# EAGLE board HackmodWear_workingcopy (EAGLE 9.2.0)
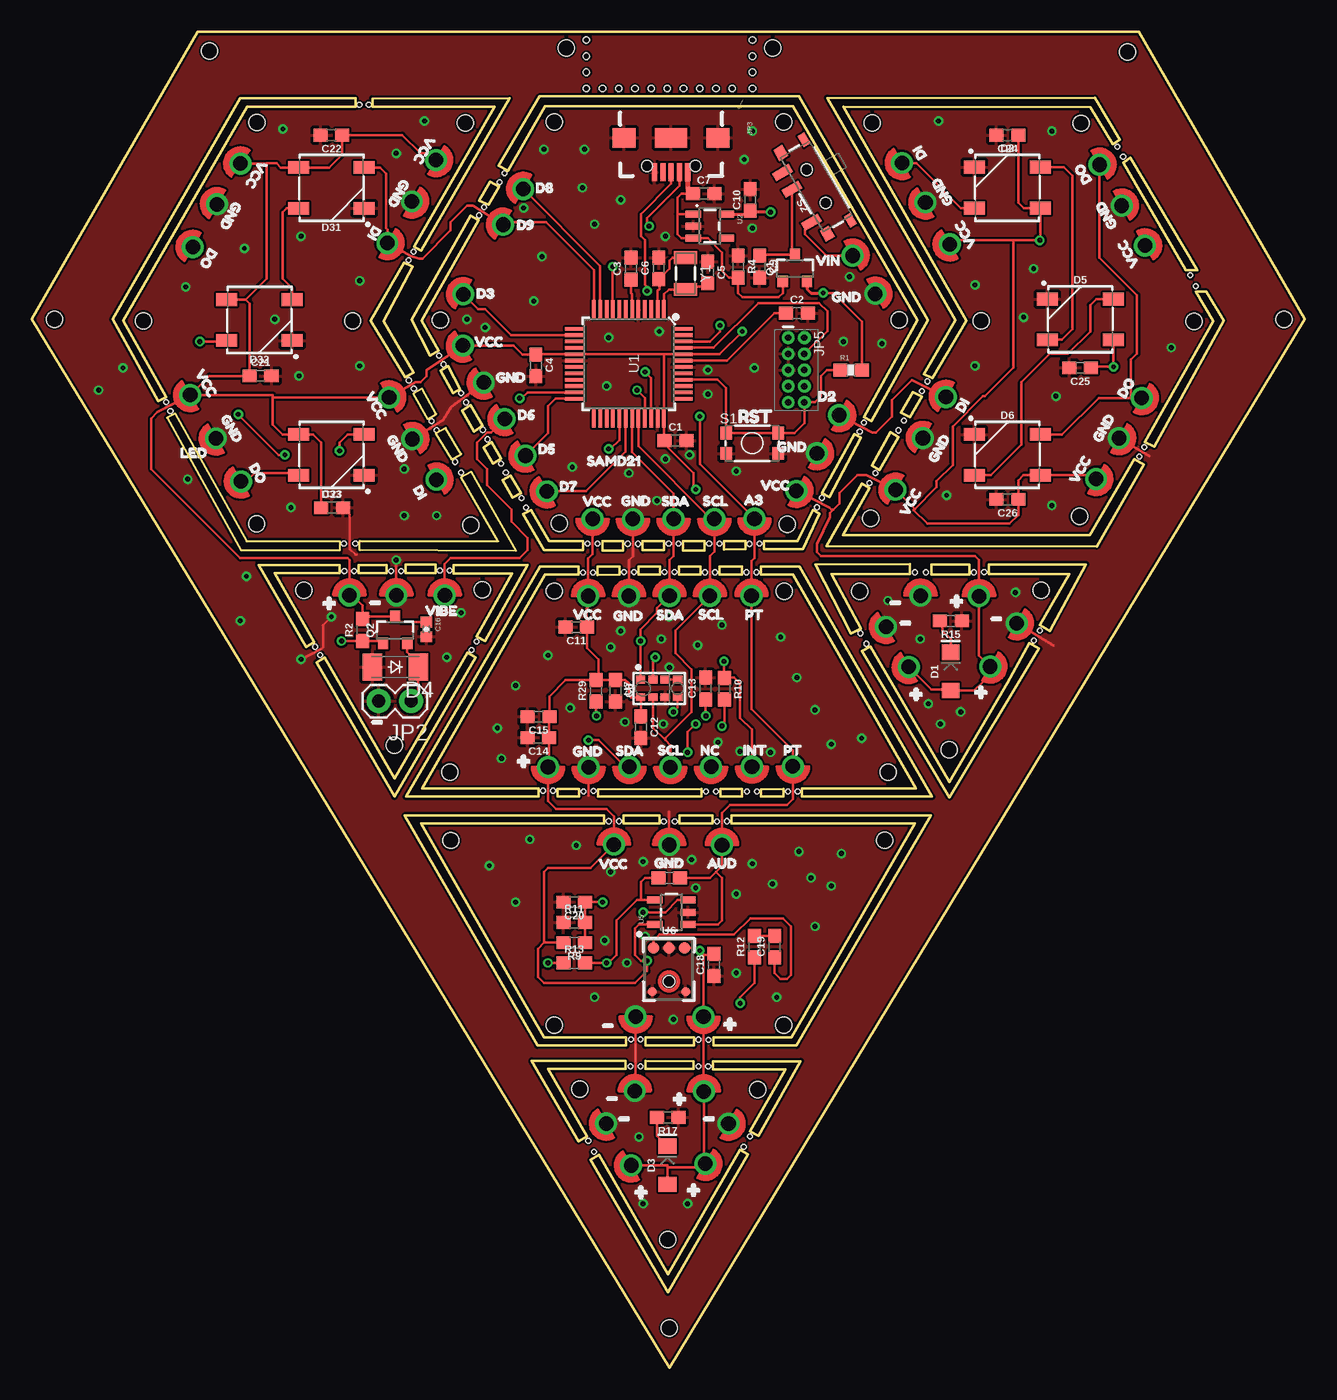
[diagram p0: board, top side]
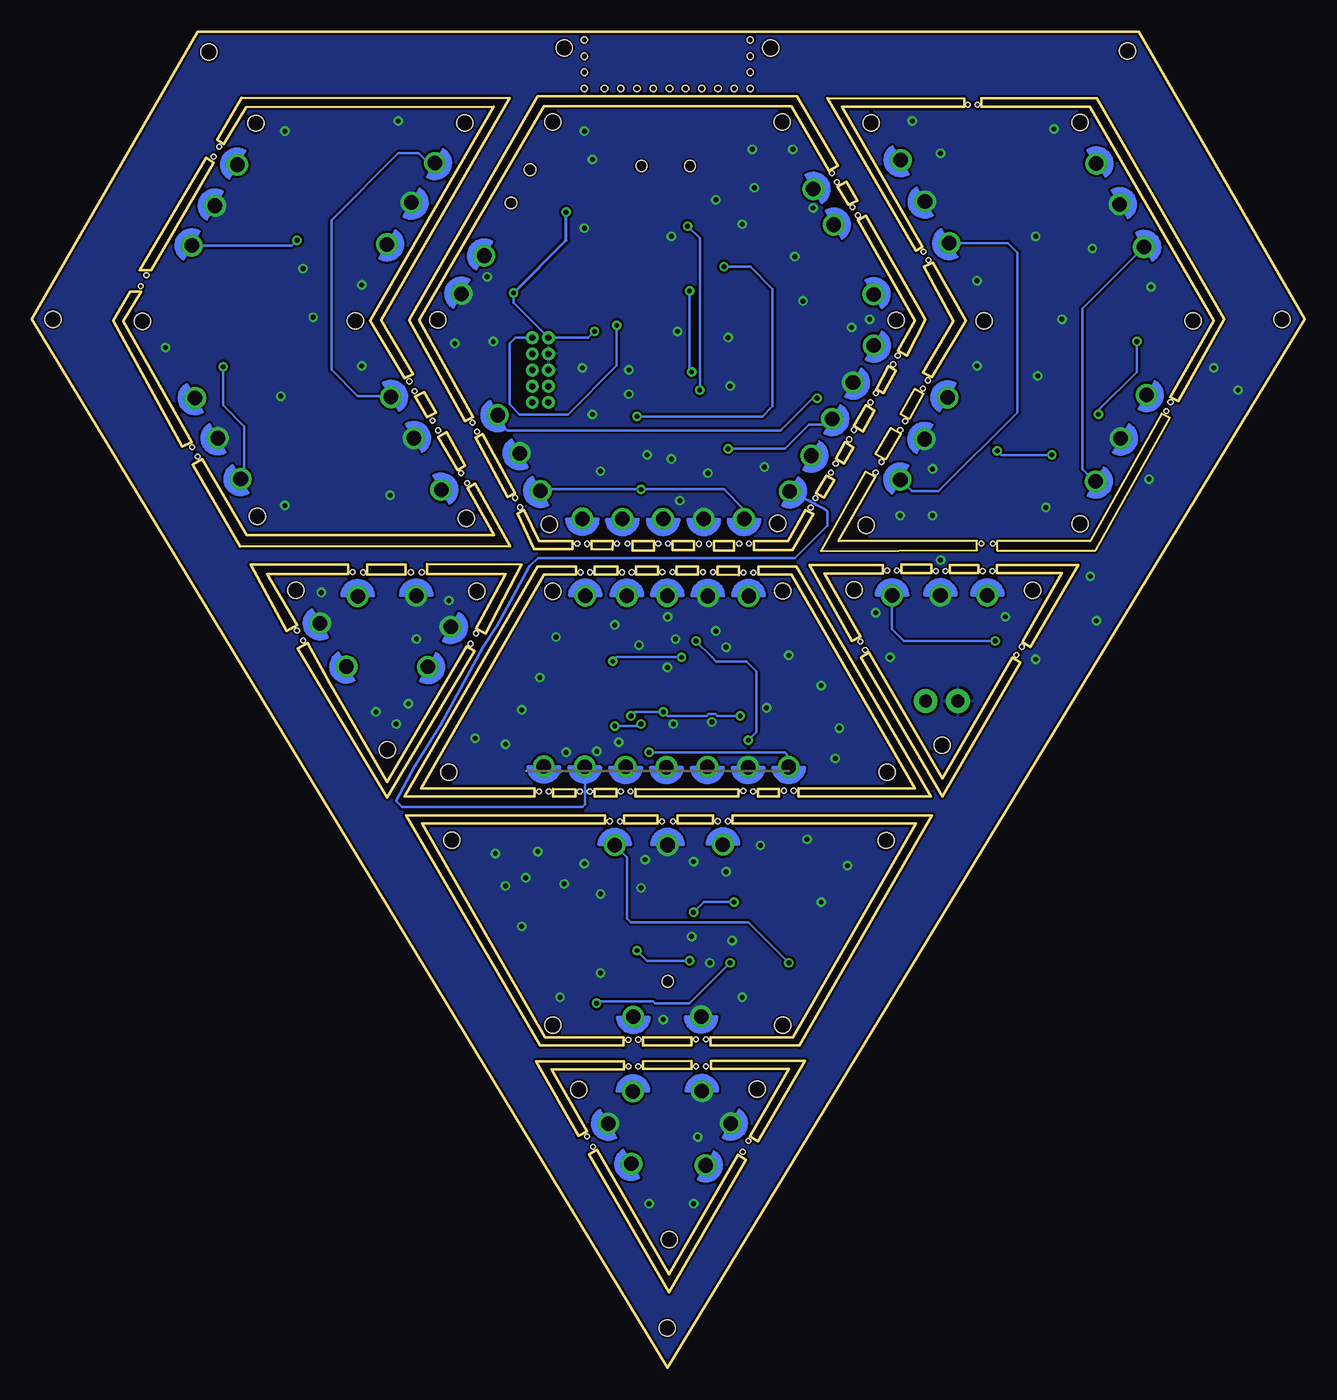
[diagram p1: board, bottom side, seen from below]

Size 99.85 x 104.77 mm. Coordinates in mm from the lower left corner, seen from the top.
Outline: 13.02,104.78 86.84,104.78 99.85,82.23 50.01,0 0,82.23 13.02,104.78
Outline: 19.05,62.33 24.14,62.33 24.14,62.96 17.78,62.96 21.51,56.53 22.15,56.92 19.05,62.33
Outline: 25.62,62.31 27.84,62.31 27.84,62.96 25.62,62.96 25.62,62.31
Outline: 29.31,62.31 31.65,62.31 31.65,62.97 29.31,62.97 29.31,62.31
Outline: 33.1,62.3 37.67,62.3 34.87,57.36 35.55,56.99 38.88,62.94 33.1,62.94 33.1,62.3
Outline: 34.18,56.09 28.45,46.2 22.96,55.68 22.33,55.3 28.45,44.8 34.81,55.71 34.18,56.09
Outline: 30.61,45.43 39.73,45.45 39.73,44.81 29.34,44.8 39.88,62.83 42.88,62.83 42.88,62.2 40.26,62.2 30.61,45.43
Outline: 41.24,45.4 42.9,45.4 42.9,44.8 41.24,44.8 41.24,45.4
Outline: 69.34,45.43 59.69,62.2 57.18,62.2 57.18,62.83 60.2,62.83 70.61,44.8 60.41,44.81 60.41,45.45 69.34,45.43
Outline: 44.37,62.19 46.09,62.2 46.09,62.82 44.37,62.82 44.37,62.19
Outline: 47.59,62.2 49.28,62.2 49.28,62.83 47.59,62.83 47.59,62.2
Outline: 50.75,62.21 52.45,62.21 52.45,62.85 50.75,62.85 50.75,62.21
Outline: 53.92,62.2 55.72,62.2 55.72,62.83 53.92,62.83 53.92,62.2
Outline: 44.42,45.36 44.42,44.81 52.51,44.81 52.51,45.37 44.42,45.36
Outline: 62.71,62.23 68.86,62.24 68.86,63.02 61.45,62.99 64.26,57.6 65.02,57.96 62.71,62.23
Outline: 70.55,62.21 73.55,62.21 73.55,63 70.55,63 70.55,62.21
Outline: 75.06,62.25 81.39,62.25 79.06,58.24 79.87,57.79 82.68,63.01 75.06,63.01 75.06,62.25
Outline: 65.77,56.57 71.97,45.94 76.5,53.7 78.23,56.83 78.99,56.39 71.98,44.74 65.13,56.23 65.77,56.57
Outline: 7.16,82.12 10.54,76.12 9.92,75.8 6.33,82.23 16.33,99.56 25.39,99.56 25.39,98.91 16.88,98.91 7.16,82.12
Outline: 16.84,64.83 24.15,64.83 24.15,64.1 16.42,64.09 10.6,74.52 11.23,74.84 16.84,64.83
Outline: 25.72,64.85 36.58,64.83 33.68,69.87 34.46,70.28 37.96,64.07 25.72,64.12 25.72,64.85
Outline: 31.69,73.27 32.91,71.23 33.68,71.66 32.46,73.7 31.69,73.27
Outline: 29.91,76.4 31.04,74.42 31.72,74.81 30.59,76.79 29.91,76.4
Outline: 29.26,77.68 29.96,78.05 27.57,82.07 29.87,86.34 29.18,86.66 26.58,82.12 29.26,77.68
Outline: 29.98,87.94 36.3,98.9 26.72,98.9 26.72,99.55 37.45,99.56 30.51,87.62 30.17,87.83 29.98,87.94
Outline: 30.57,82.14 35.05,89.99 34.43,90.35 29.77,82.19 31.23,79.37 31.9,79.79 30.57,82.14
Outline: 35.1,91.54 35.81,91.21 36.65,92.63 35.95,93.02 35.1,91.54
Outline: 32.65,78.54 33.6,76.77 33.06,76.44 32.07,78.2 32.65,78.54
Outline: 34.42,75.51 35.36,73.9 34.68,73.43 33.76,75.05 34.42,75.51
Outline: 44.77,64.83 46.37,64.83 46.37,64.09 44.77,64.09 44.77,64.83
Outline: 47.9,64.83 49.59,64.83 49.59,64.13 47.9,64.13 47.9,64.83
Outline: 51.07,64.82 52.76,64.83 52.76,64.09 51.07,64.08 51.07,64.82
Outline: 54.29,64.82 55.97,64.83 55.97,64.19 54.29,64.18 54.29,64.82
Outline: 37.35,93.87 36.61,94.29 39.84,99.72 43.45,99.72 60.19,99.73 70.27,82.18 65.86,74.26 65.26,74.55 69.47,82.16 59.69,98.94 40.27,98.94 37.35,93.87
Outline: 73.3,82.12 70.62,77.6 69.95,77.93 72.45,82.16 62.4,99.58 83.38,99.59 85.34,96.32 84.8,95.97 83.03,98.88 63.64,98.89 73.3,82.12
Outline: 69.81,76.16 68.86,74.57 68.15,74.9 69.11,76.51 69.81,76.16
Outline: 67.98,73.01 66.47,70.39 65.88,70.76 67.33,73.37 67.98,73.01
Outline: 65.68,68.99 63.6,65.32 82.99,65.32 86.49,71.27 87.24,70.85 83.53,64.42 62.33,64.45 65.1,69.36 65.68,68.99
Outline: 36.07,72.6 36.79,71.3 36.16,70.91 35.42,72.18 36.07,72.6
Outline: 37.54,69.98 38.35,68.59 37.72,68.24 36.91,69.63 37.54,69.98
Outline: 39.17,67.25 40.56,64.83 43.23,64.83 43.23,64.13 40.18,64.13 38.53,66.94 39.17,67.25
Outline: 85.61,94.53 90.51,86.1 91.41,86.1 86.18,94.9 85.61,94.53
Outline: 91.29,84.4 92.68,82.09 87.3,72.59 88.05,72.25 93.49,82.12 92.13,84.4 91.29,84.4
Outline: 69.25,42.67 54.88,42.67 54.88,43.31 70.52,43.31 59.98,25.27 53.46,25.27 53.46,25.91 59.59,25.91 69.25,42.67
Outline: 53.4,42.67 50.78,42.67 50.78,43.31 53.4,43.31 53.4,42.67
Outline: 30.51,42.67 40.16,25.91 46.62,25.91 46.62,25.27 39.66,25.27 29.24,43.31 44.89,43.32 44.89,42.68 30.51,42.67
Outline: 51.93,25.91 48.13,25.91 48.13,25.27 51.93,25.27 51.93,25.91
Outline: 49.23,42.67 49.23,43.31 46.42,43.31 46.42,42.67 49.23,42.67
Outline: 40.48,23.43 46.57,23.42 46.57,24.05 39.21,24.07 42.89,17.77 43.53,18.15 40.48,23.43
Outline: 48.13,23.44 51.9,23.43 51.9,24.04 48.13,24.06 48.13,23.44
Outline: 53.42,23.41 59.1,23.41 56.32,18.54 56.99,18.17 60.31,24.04 53.42,24.04 53.42,23.41
Outline: 55.53,17.09 49.88,7.3 44.47,16.68 43.83,16.29 49.88,5.91 56.17,16.71 55.53,17.09
Outline: 57.44,64.84 57.44,64.19 60.47,64.19 61.77,66.99 61.25,67.25 60.06,64.84 57.44,64.84
Outline: 61.96,68.6 64.52,73.21 65.04,72.94 62.55,68.3 61.96,68.6
Outline: 54.01,45.37 54.01,44.81 55.72,44.81 55.72,45.37 54.01,45.37
Outline: 57.2,45.36 57.2,44.81 58.96,44.81 58.96,45.37 57.2,45.36
Copper layers (1*16): Top 0.035mm / dielectric 1.5mm / Bottom 0.035mm
Design rules "SparkFun-2-layer-TIGHT": minimum track width 7mil, minimum drill 15mil, track to track 7mil, track to pad 7mil, pad to pad 7mil, via to via 7mil, smd to smd 7mil, copper to edge 7mil, drill to drill 7mil, minimum pad ring 7mil, minimum via ring 7mil, stop-mask expansion 4mil, vias tented up to drill 25mil, thermal gap 10mil
Holes 1.27 mm at 32.78,46.72 34.43,66.09 79.16,60.97 34.02,97.62 40.97,26.87 66.91,41.35 59.27,66.13 21.34,60.96 28.45,48.82 41.91,103.5 58.99,26.86 35.35,61 85.96,103.18 65.91,97.63 65.79,66.61 82.3,97.61 40.97,60.91 59,60.88 41.37,66.21 32.06,82.16 40.99,97.73 50,3.11 8.76,82.12 17.63,97.66 17.63,66.2 71.96,48.48 74.47,82.11 64.95,60.88 67.16,46.69 82.17,66.76 58.1,103.5 25.16,82.09 13.92,103.27 42.98,21.83 56.94,21.82 32.86,41.35 58.99,97.72 68.03,82.18 91.18,82.08 49.87,10.04 1.79,82.22 98.2,82.24
Holes 0.51 mm at 43.5,100.33 43.5,101.6 43.5,102.87 43.5,104.14 56.52,100.33 56.52,101.6 56.52,102.87 56.52,104.14 48.58,100.33 47.31,100.33 46.04,100.33 44.77,100.33 53.66,100.33 52.39,100.33 51.12,100.33 49.85,100.33 54.93,100.33
Holes 0.38 mm at 25.69,99.05 26.43,99.07 29.54,86.87 29.93,87.55 29.57,77.44 29.96,76.78 31.35,74.24 31.74,73.54 33.21,71.05 33.67,70.21 31.94,79.38 32.29,78.69 33.66,76.45 34.07,75.71 35.74,72.82 35.37,73.56 36.8,70.9 37.17,70.21 38.4,68.19 38.76,67.46 43.59,64.63 44.37,64.64 46.74,64.62 47.54,64.62 49.96,64.63 50.72,64.63 53.13,64.63 53.94,64.64 56.29,64.62 57.07,64.64 56.06,62.38 56.83,62.39 53.57,62.39 52.79,62.39 50.41,62.4 49.61,62.4 47.22,62.4 46.44,62.4 44.02,62.38 43.24,62.37 24.52,62.49 25.37,64.63 24.47,64.64 25.28,62.48 28.19,62.48 28.96,62.5 32,62.51 32.77,62.51 34.87,56.97 34.49,56.29 22.21,56.55 22.63,55.89 40.09,45.26 40.87,45.26 43.27,45.21 44.06,45.22 52.88,45.19 53.66,45.19 56.1,45.21 56.87,45.21 45.25,42.86 46.05,42.86 49.57,42.85 50.43,42.84 52.28,23.62 53.05,23.64 46.97,23.62 47.75,23.63 65,57.6 65.46,56.78 79.07,57.82 78.59,57.04 73.88,62.39 74.7,62.41 70.13,62.39 69.27,62.39 87.27,72.21 86.86,71.47 91.31,84.82 90.87,85.68 85.6,94.99 85.15,95.76 70.24,77.36 65.27,74.13 69.82,76.61 68.41,74.29 67.98,73.51 66.18,70.17 65.71,69.37 35.06,90.37 35.48,91.02 10.53,75.74 10.86,75.04 36.69,92.98 37.09,93.69 64.93,73.42 61.57,67.48 61.96,68.23 60.07,45.2 59.31,45.2 53.73,42.84 54.52,42.86 43.65,17.79 44.09,16.92 55.84,17.32 56.32,18.14 46.99,25.74 47.75,25.74 52.29,25.73 53.08,25.72

## Footprints (pad centres in the part's own frame; a part is rotated, then mirrored left to right if it is on the bottom)
0603 = smd 1.1 x 1: 1 -0.85,0; 2 0.85,0
0402-CAP = smd 0.85 x 0.9: 1 -0.58,0; 2 0.58,0
LED-1206 = smd 1.2 x 1.4: A -1.5,0; C 1.5,0
WS2812B = smd 1.651 x 1: 1 2.577,-1.6; 2 2.577,1.6; 3 -2.577,1.6; 4 -2.577,-1.6
SOD-123_MINI-SMA = smd 1.5 x 2.1: A 1.8,0; C -1.8,0
1X01 = drill 1.143: P$1 0,0
1X02@1 = drill 1.016 pad 1.88: 1 0,0; 2 2.54,0
USB-AB-MICRO-SMD_V03 = smd 1.4 x 0.4: D+1 2.7,0; D-1 2.7,0.65; GND1 2.7,-1.3; ID1 2.7,-0.65; VBUS1 2.7,1.3 | smd 1.5 x 1.8: SHIELD1 0,3.68; SHIELD3 0,-3.68 | smd 1.5 x 2.5: SHIELD2 0,0 | hole 0.85: 2.2,1.9; 2.2,-1.9
2X5-PTH-1.27MM = drill 0.508 pad 1: 1 -2.54,-0.635; 2 -2.54,0.635; 3 -1.27,-0.635; 4 -1.27,0.635; 5 0,-0.635; 6 0,0.635; 7 1.27,-0.635; 8 1.27,0.635; 9 2.54,-0.635; 10 2.54,0.635
SOT23-3 = smd 0.8 x 0.9: 1 -0.95,-1; 2 0.95,-1; 3 0,1.1
0603-RES@1 = smd 1.1 x 1: 1 -0.85,0; 2 0.85,0
TACTILE_SWITCH_SMD_4.6X2.8MM = smd 0.9 x 1: 1 -2.05,-0.8; 2 2.05,-0.8; 3 2.05,0.8; 4 -2.05,0.8
SWITCH_SPST_SMD_A = smd 0.7 x 1.5: 1 -2.25,-1.75; 2 -0.75,-1.75; 3 2.25,-1.75 | smd 1 x 0.6: GND1 -3.65,1; GND3 3.65,1 | smd 1 x 0.8: GND2 -3.65,-1.1; GND4 3.65,-1.1 | hole 0.9: -1.5,0; 1.5,0
TQFP-48 = smd 1.5 x 0.28: 1 -4.25,2.75; 2 -4.25,2.25; 3 -4.25,1.75; 4 -4.25,1.25; 5 -4.25,0.75; 6 -4.25,0.25; 7 -4.25,-0.25; 8 -4.25,-0.75; 9 -4.25,-1.25; 10 -4.25,-1.75; 11 -4.25,-2.25; 12 -4.25,-2.75; 25 4.25,-2.75; 26 4.25,-2.25; 27 4.25,-1.75; 28 4.25,-1.25; 29 4.25,-0.75; 30 4.25,-0.25; 31 4.25,0.25; 32 4.25,0.75; 33 4.25,1.25; 34 4.25,1.75; 35 4.25,2.25; 36 4.25,2.75 | smd 0.28 x 1.5: 13 -2.75,-4.25; 14 -2.25,-4.25; 15 -1.75,-4.25; 16 -1.25,-4.25; 17 -0.75,-4.25; 18 -0.25,-4.25; 19 0.25,-4.25; 20 0.75,-4.25; 21 1.25,-4.25; 22 1.75,-4.25; 23 2.25,-4.25; 24 2.75,-4.25; 37 2.75,4.25; 38 2.25,4.25; 39 1.75,4.25; 40 1.25,4.25; 41 0.75,4.25; 42 0.25,4.25; 43 -0.25,4.25; 44 -0.75,4.25; 45 -1.25,4.25; 46 -1.75,4.25; 47 -2.25,4.25; 48 -2.75,4.25
SOT23-5 = smd 0.55 x 1.2: 1 -0.95,-1.3; 2 0,-1.3; 3 0.95,-1.3; 4 0.95,1.3; 5 -0.95,1.3
ADMP401 = smd 0.9 x 0.9: 1 -1.2,2.62; 5 1.2,2.62; 6 0,2.62 | smd 0.7 x 0.7: 2 1.3,-0.8; 4 -1.3,-0.8 | hole 0.9: 0,0
APDS-9960 = smd 0.6 x 0.72: 1 0.7,1.455; 2 0.7,0.485; 3 0.7,-0.485; 4 0.7,-1.455; 5 -0.7,-1.455; 6 -0.7,-0.485; 7 -0.7,0.485; 8 -0.7,1.455
CRYSTAL-SMD-3.2X1.5MM = smd 1 x 1.8: P$1 -1.25,0; P$2 1.25,0

## Placement (x,y rotation side)
C1  0.1uF  [0603]  50.48,72.71 0 top
C2  0.1uF  [0603]  60.01,82.71 0 top
C3  0.1uF  [0603]  46.99,86.2 90 top
C4  0.1uF  [0603]  39.53,78.61 270 top
C5  15pF  [0603]  53.02,85.92 270 top
C6  15pF  [0603]  49.17,86.23 90 top
C7  0.1uF  [0603]  52.71,92.08 0 top
C8  1.0uF  [0603]  45.78,53.1 270 top
C9  10uF  [0603]  57.09,86.36 270 top
C10  10uF  [0603]  56.36,91.6 90 top
C11  1.0uF  [0603]  42.7,58.08 180 top
C12  1.0uF  [0603]  47.76,50.24 270 top
C13  1.0uF  [0603]  52.85,53.27 90 top
C14  1.0uF  [0603]  39.71,49.42 180 top
C15  1.0uF  [0603]  39.74,51.06 180 top
C16  1.0uF  [0402-CAP]  30.95,57.91 270 top
C17  100pF  [0603]  50.01,38.42 0 top
C18  0.1uF  [0603]  53.5,31.59 90 top
C19  4.7uF  [0603]  58.26,33.02 90 top
C20  1.0uF  [0603]  42.55,36.51 180 top
C21  0.1uF  [0603]  17.94,77.79 0 top
C22  0.1uF  [0603]  23.49,96.68 180 top
C23  0.1uF  [0603]  23.55,67.45 0 top
C24  0.1uF  [0603]  76.52,96.68 180 top
C25  0.1uF  [0603]  82.23,78.42 180 top
C26  0.1uF  [0603]  76.52,68.1 180 top
D1  [LED-1206]  72.07,54.61 90 top
D2  WS2812B  [WS2812B]  76.52,92.55 0 top
D3  [LED-1206]  49.85,15.88 90 top
D4  MBR120ESF  [SOD-123_MINI-SMA]  28.51,54.95 180 top
D5  WS2812B  [WS2812B]  82.24,82.22 0 top
D6  WS2812B  [WS2812B]  76.52,71.6 0 top
D31  WS2812B  [WS2812B]  23.5,92.53 180 top
D32  WS2812B  [WS2812B]  17.85,82.17 180 top
D33  WS2812B  [WS2812B]  23.49,71.6 180 top
J1  [1X01]  52.68,27.52 180 top
J2  [1X01]  47.36,27.55 180 top
J3  [1X01]  38.72,71.54 120 top
J4  [1X01]  28.59,60.58 0 top
J5  [1X01]  40.4,68.74 120 top
J6  [1X01]  35.45,77.27 120 top
J7  [1X01]  67.75,68.86 60 top
J8  [1X01]  38.55,92.45 60 top
J9  [1X01]  36.96,89.65 60 top
J10  [1X01]  56.68,66.59 180 top
J11  [1X01]  47.15,66.57 180 top
J12  [1X01]  50.34,66.58 180 top
J13  [1X01]  50.08,47.11 180 top
J14  [1X01]  63.32,74.71 243 top
J15  [1X01]  53.18,60.53 0 top
J16  [1X01]  50.01,60.53 0 top
J17  [1X01]  43.64,60.52 0 top
J18  [1X01]  37.08,74.42 120 top
J19  [1X01]  46.83,60.52 0 top
J20  [1X01]  24.91,60.57 0 top
J21  [1X01]  32.39,60.57 0 top
J22  [1X01]  56.45,60.54 0 top
J23  [1X01]  33.84,84.19 60 top
J24  [1X01]  53.28,47.12 180 top
J25  [1X01]  31.7,94.72 240 top
J26  [1X01]  31.72,69.65 300 top
J27  [1X01]  14.53,91.26 60 top
J28  [1X01]  40.49,47.12 180 top
J29  [1X01]  43.67,47.11 180 top
J30  [1X01]  45.65,41.03 0 top
J31  [1X01]  49.99,41 0 top
J32  [1X01]  27.89,88.21 240 top
J33  [1X01]  29.83,72.83 300 top
J34  [1X01]  28.02,76.1 300 top
J35  [1X01]  59.69,47.16 180 top
J37  [1X01]  54.13,40.99 0 top
J38  [1X01]  53.54,66.57 180 top
J39  [1X01]  46.87,47.12 180 top
J40  [1X01]  56.48,47.15 180 top
J41  [1X01]  16.41,69.51 120 top
J42  [1X01]  71.7,76.14 60 top
J43  [1X01]  29.81,91.47 240 top
J44  [1X01]  16.36,94.44 55 top
J45  [1X01]  12.42,76.3 120 top
J46  [1X01]  14.44,72.89 120 top
J47  [1X01]  72,88.11 120 top
J48  [1X01]  83.74,94.35 300 top
J49  [1X01]  85.49,91.14 300 top
J50  [1X01]  87.05,76.06 240 top
J51  [1X01]  70.09,91.4 120 top
J52  [1X01]  87.31,88.02 300 top
J53  [1X01]  68.25,94.49 120 top
J54  [1X01]  12.62,87.9 60 top
J55  [1X01]  69.89,72.91 60 top
J56  [1X01]  33.82,80.17 120 top
J57  [1X01]  83.48,69.71 240 top
J58  [1X01]  85.27,72.91 240 top
J59  [1X01]  77.25,58.39 240 top
J60  [1X01]  75.17,55 240 top
J61  [1X01]  67,58.11 120 top
J62  [1X01]  68.79,54.96 120 top
J63  [1X01]  69.7,60.55 0 top
J64  [1X01]  74.3,60.51 0 top
J65  [1X01]  47.29,21.69 0 top
J66  [1X01]  52.83,15.99 240 top
J67  [1X01]  45.04,19.15 120 top
J68  [1X01]  47,15.87 120 top
J69  [1X01]  54.64,19.14 240 top
J70  [1X01]  52.71,21.67 0 top
J71  [1X01]  64.37,87.22 300 top
J72  [1X01]  66.15,84.23 300 top
J73  [1X01]  43.99,66.58 180 top
J75  [1X01]  61.58,71.73 240 top
J76  [1X01]  59.96,68.78 240 top
JP2  [1X02@1]  29.74,52.28 180 top
JP3  [USB-AB-MICRO-SMD_V03]  50.15,96.46 270 top
JP5  CORTEX_DEBUGPTH  [2X5-PTH-1.27MM]  59.96,78.25 270 top
Q1  ZXMP6A13F  [SOT23-3]  59.85,86.2 0 top
Q2  NTR4101P  [SOT23-3]  28.49,57.83 0 top
R1  10K  [0603-RES@1]  64.26,78.24 0 top
R2  10k  [0603]  25.94,57.85 90 top
R4  10k  [0603]  55.4,86.36 270 top
R9  10k  [0603]  42.55,33.34 180 top
R10  100k  [0603]  54.33,53.24 270 top
R11  10k  [0603]  42.55,34.92 0 top
R12  1.5k  [0603]  56.67,33.02 90 top
R13  100k  [0603]  42.55,31.75 0 top
R15  330  [0603]  72.09,58.58 180 top
R17  330  [0603]  49.89,19.63 180 top
R29  0  [0603]  44.25,53.09 90 top
S1  RESET  [TACTILE_SWITCH_SMD_4.6X2.8MM]  56.5,72.51 0 top
S2  [SWITCH_SPST_SMD_A]  61.53,92.67 300 top
U1  ATSAMD21G-A  [TQFP-48]  46.83,78.74 270 top
U2  3.3V  [SOT23-5]  53.18,89.53 270 top
U5  OPA344  [SOT23-5]  50.16,35.72 90 top
U6  ADMP401  [ADMP401]  49.97,30.29 0 top
U7  APDS-9960  [APDS-9960]  49.2,53.27 90 top
U$1  [GND2]  45.55,67.98 0 top
U$2  [A313]  55.18,68.06 0 top
U$3  [D517]  39.03,72.06 0 top
U$4  [D314]  34.06,84.26 0 top
U$5  [DO7]  16.99,71.44 300 top
U$6  [D616]  37.41,74.75 0 top
U$7  [D718]  40.7,69.13 0 top
U$8  [D811]  38.84,92.55 0 top
U$9  [D912]  37.34,89.64 0 top
U$10  [GND2]  14.76,75.25 300 top
U$11  [DI6]  27.46,90.01 240 top
U$12  [GND2]  35.73,77.68 0 top
U$13  [SCL5]  51.95,67.98 0 top
U$14  [SDA4]  48.72,67.97 0 top
U$15  [#15]  21.43,60.17 0 top
U$16  [VCC1]  43.66,39.51 0 top
U$17  [#15]  70.64,60.32 0 top
U$18  [#15]  67.47,53.02 0 top
U$19  [GND2]  48.16,39.59 0 top
U$20  [VCC1]  41.63,59.07 0 top
U$21  [GND2]  44.94,58.99 0 top
U$22  [SDA4]  48.31,59.04 0 top
U$23  [SCL5]  51.61,59.07 0 top
U$24  [#15]  72.55,53.18 0 top
U$25  [#15]  52.86,27.15 0 top
U$26  [GND2]  57.79,72.23 0 top
U$27  [#15]  48.9,21.27 0 top
U$28  [#15]  45.88,13.97 0 top
U$29  [AUD0]  52.27,39.57 0 top
U$30  [RST15]  54.45,74.61 0 top
U$31  [VCC1]  56.36,69.22 0 top
U$32  [VCC1]  42.39,67.94 0 top
U$33  [VCC1]  33.9,80.47 0 top
U$34  [#15]  50.01,14.13 0 top
U$35  [VCC1]  12.7,78.9 300 top
U$36  [VIN20]  60.8,86.84 0 top
U$37  [GND2]  62.07,83.98 0 top
U$38  [GND2]  62.07,83.98 0 top
U$39  [VCC1]  18.57,95.25 240 top
U$40  [GND2]  29.69,93.66 240 top
U$41  [VCC1]  31.75,97.16 240 top
U$42  [GND2]  16.51,91.92 240 top
U$43  [DO7]  14.61,88.27 240 top
U$44  [VCC1]  26.04,77.15 300 top
U$45  [GND2]  27.78,73.66 300 top
U$46  [DI6]  29.84,69.69 300 top
U$47  [VCC1]  74.19,87.19 120 top
U$48  [VCC1]  86.96,85.67 120 top
U$49  [GND2]  72.32,90.62 120 top
U$50  [GND2]  85.18,88.79 120 top
U$51  [DI6]  70.24,94.24 120 top
U$52  [DO7]  83.18,92.32 120 top
U$53  [DO7]  85.08,75.56 60 top
U$54  [VCC1]  67.94,66.2 60 top
U$55  [GND2]  70.23,70.51 60 top
U$56  [GND2]  83.15,72.12 60 top
U$57  [DI6]  72.39,74.45 60 top
U$58  [VCC1]  81.25,68.76 60 top
U$59  [#15]  36.67,47.78 0 top
U$60  [SDA4]  45.14,48.4 0 top
U$61  [#16]  25.08,60.32 0 top
U$62  [#16]  25.24,50.96 0 top
U$63  [#16]  65.88,60.32 0 top
U$64  [#16]  73.82,59.05 0 top
U$65  [#16]  66.67,58.74 0 top
U$66  [#16]  43.66,21.43 0 top
U$67  [#16]  44.61,19.84 0 top
U$68  [#16]  51.28,19.84 0 top
U$69  [#16]  43.34,27.15 0 top
U$70  [GND2]  41.76,48.35 0 top
U$71  [SCL5]  51.61,59.07 0 top
U$72  [SCL5]  48.43,48.44 0 top
U$73  [INT14]  55.09,48.42 0 top
U$74  [PT2]  58.26,48.42 0 top
U$75  [PT2]  58.26,48.42 0 top
U$76  [PT2]  55.25,59.05 0 top
U$77  [D211]  60.96,76.2 0 top
U$78  [LED4]  10.95,71.75 0 top
U$79  [SAMD2112]  42.86,71.12 0 top
U$80  [VIBE1]  30.16,59.37 0 top
U$81  [NC0]  51.75,48.42 0 top
Y1  32.768kHz  [CRYSTAL-SMD-3.2X1.5MM]  51.28,85.82 270 top

## Library data of the parts
C1-C4 C7 C18 C21-C26 = SparkFun-Capacitors; PROD_ID: CAP-00810
C5 C6 = SparkFun-Capacitors; PROD_ID: CAP-07881
C8 C11-C15 C20 = SparkFun-Capacitors; PROD_ID: CAP-00868
C9 C10 = SparkFun-Capacitors; PROD_ID: CAP-11015
C16 = SparkFun-Capacitors; PROD_ID: CAP-12417
C17 = SparkFun-Capacitors; PROD_ID: CAP-07883
C19 = SparkFun-Capacitors; PROD_ID: CAP-08280
D1 D3 = SparkFun-LED
D2 D5 D6 D31-D33 = SparkFun-LED; PROD_ID: DIO-12503
D4 = diode
J1-J35 J37-J73 J75 J76 JP2 = SparkFun-Connectors
JP3 = SparkFun-Connectors; PROD_ID: CONN-11794
JP5 = samd21-temp
Q1 = SparkFun-DiscreteSemi; PROD_ID: TRANS-08285
Q2 = SparkFun-DiscreteSemi; PROD_ID: TRANS-11308
R1 R2 R4 R9 R11 = SparkFun-Resistors; PROD_ID: RES-00824
R10 R13 = SparkFun-Resistors; PROD_ID: RES-07828
R12 = SparkFun-Resistors; PROD_ID: RES-08306
R15 R17 = SparkFun-Resistors; PROD_ID: RES-00818
R29 = SparkFun-Resistors; PROD_ID: RES-08609
S1 = samd21-temp; PROD_ID: SWCH-13065
S2 = SparkFun-Switches; PROD_ID: SWCH-10651; SF_SKU: COM-10860
U1 = samd21-temp; PROD_ID: IC-13064
U2 = SparkFun-PowerIC; PROD_ID: VREG-12457
U5 = SparkFun
U6 = SparkFun-Sensors; PROD_ID: IC-09773
U7 = SparkFun-Sensors; PROD_ID: SEN-12005
U$1-U$14 U$16 U$19-U$23 U$26 U$31-U$33 U$35-U$58 U$60 U$70-U$72 = buzzard_labels(2)
U$15 U$17 U$18 U$24 U$25 U$27-U$29 U$34 U$59 U$61-U$69 U$73-U$80 = buzzard_labels(4)
U$30 = buzzard_labels(3)
U$81 = buzzard_labels(5)
Y1 = samd21-temp; PROD_ID: XTAL-13062

## Nets
1: J24.P$1
3.3V: C1.1 C4.1 C8.1 C10.1 C11.1 C12.1 C14.1 C15.1 C16.1 C18.2 C21.1 C22.1 C23.1 C24.1 C25.1 C26.1 D1.A D2.1 D3.A D5.1 D6.1 D31.1 D32.1 D33.1 J1.P$1 J7.P$1 J17.P$1 J20.P$1 J25.P$1 J28.P$1 J30.P$1 J34.P$1 J44.P$1 J45.P$1 J47.P$1 J52.P$1 J56.P$1 J57.P$1 J60.P$1 J62.P$1 J64.P$1 J66.P$1 J68.P$1 J70.P$1 J73.P$1 J76.P$1 JP5.1 Q1.2 Q2.3 R1.2 R2.2 R9.2 R10.2 R29.2 U1.17 U1.36 U1.44 U2.5 U5.5 U6.5 U7.8
!RESET: JP5.10 R1.1 S1.3 S1.4 U1.40
A0: U1.3
A1: U1.7
A2: U1.8
A3: C17.2 J10.P$1 J22.P$1 J35.P$1 J37.P$1 R13.1 U1.9 U5.1
D0/RXI: U1.16
D1/TXO: U1.15
D2: D2.4 J14.P$1 J42.P$1 J53.P$1 U1.23
D3: J23.P$1 U1.14
D4: U1.13
D5: J3.P$1 U1.24
D6: J18.P$1 J21.P$1 Q2.1 R2.1 U1.29
D7: J5.P$1 J40.P$1 R10.1 U1.30 U7.2
D8: J8.P$1 U1.11
D9: D31.4 J9.P$1 J26.P$1 J32.P$1 U1.12
D10/SS: U1.27
D11/MOSI: U1.25
D12/MISO: U1.28
D13/SCK: U1.26
DO: D33.2 J41.P$1 J54.P$1
DOUT: D6.2 J48.P$1 J50.P$1
GND: C1.2 C2.2 C3.2 C4.2 C5.1 C6.2 C7.2 C8.2 C9.2 C10.2 C11.2 C12.2 C13.2 C14.2 C15.2 C16.2 C18.1 C20.2 C21.2 C22.2 C23.2 C24.2 C25.2 C26.2 D2.3 D4.A D5.3 D6.3 D31.3 D32.3 D33.3 J2.P$1 J4.P$1 J6.P$1 J11.P$1 J19.P$1 J27.P$1 J29.P$1 J31.P$1 J33.P$1 J43.P$1 J46.P$1 J49.P$1 J51.P$1 J55.P$1 J58.P$1 J59.P$1 J61.P$1 J63.P$1 J65.P$1 J67.P$1 J69.P$1 J72.P$1 J75.P$1 JP2.2 JP3.GND1 JP3.SHIELD1 JP3.SHIELD2 JP3.SHIELD3 JP5.3 JP5.5 R4.1 R11.1 R15.1 R17.1 S1.1 S1.2 U1.5 U1.18 U1.35 U1.42 U2.2 U5.2 U6.2 U6.4 U6.6 U7.6
ID: JP3.ID1
LEDA: C13.1 R29.1 U7.5
N$2: C5.2 U1.1 Y1.P$2
N$3: C19.1 U6.1
N$4: C6.1 U1.2 Y1.P$1
N$5: U7.3 U7.4
N$6: C17.1 R12.1 R13.2 U5.4
N$7: D4.C JP2.1 Q2.2
N$10: C19.2 R12.2
N$11: C20.1 R9.1 R11.2 U5.3
N$12: D1.C R15.2
N$14: D31.2 D32.4
N$15: D3.C R17.2
N$16: D32.2 D33.4
N$21: J71.P$1 S2.3
N$22: D2.2 D5.4
N$23: D5.2 D6.4
SCL: J13.P$1 J15.P$1 J38.P$1 U1.32 U7.7
SDA: J12.P$1 J16.P$1 J39.P$1 U1.31 U7.1
SWCLK: JP5.4 U1.45
SWDIO: JP5.2 U1.46
USB_D+: JP3.D+1 U1.34
USB_D-: JP3.D-1 U1.33
VBUS: C7.1 JP3.VBUS1 Q1.1 R4.2 U2.1 U2.3
VDDANA: C3.1 U1.6
VDDCORE: C2.1 U1.43
VIN: C9.1 Q1.3 S2.2

## Tracks (layer width: path | path; a pad name or v marks a point on that pad's centre or on a via)
1
  Top 0.178: J24.P$1 53.23,47.12
3.3V  (via drill 0.38)
  Top 0.178: 49.58,72.76 U1.36 49.58,79.44 49.53,79.49 | 49.58,72.76 C1.1 | v55.72,81.28 53.93,79.49 U1.44 49.53,79.49 | R1.2 65.11,82.06 62.87,84.3 v62.07,84.3 | 49.58,72.76 49.58,72.5 51.91,70.17 51.91,68.9 v52.07,68.9 | 49.53,79.49 U1.17 39.56,79.49 C4.1 38.49,79.46 37.78,80.17 J56.P$1 30.96,78.26 30.96,77.79 30.48,77.31 30.1,77.31 J34.P$1 18.89,76.1 | J25.P$1 31.17,95.25 30.48,95.25 29.05,96.68 C22.1 24.34,95.15 23.33,94.13 D31.1 19.53,94.13 19.21,94.46 18.41,94.46 18.41,94.44 | 18.41,94.44 J44.P$1 | D32.1 16.78,83.77 | 18.41,94.44 18.41,85.41 16.78,83.77 | J45.P$1 13.91,77.79 C21.1 17.09,83.46 16.78,83.77 | J45.P$1 18.89,76.3 18.89,76.1 | 18.89,76.1 18.89,73.98 19.67,73.2 D33.1 20.93,73.18 22.07,73.18 22.7,72.55 C23.1 | D5.1 84.82,78.53 v84.85,78.5 83.16,78.5 C25.1 | C24.1 77.37,91.38 77.8,90.95 D2.1 79.09,88.46 v79.06,88.42 76.99,88.42 72.31,88.42 J47.P$1 | 69.17,67.26 70.23,66.2 76.68,66.2 77.37,66.89 C26.1 77.37,69.59 77.77,70 D6.1 83.19,70 J57.P$1 | 69.25,67.35 J7.P$1 | R29.2 C8.1 46.54,53.95 46.83,53.66 46.83,52.71 46.99,52.55 47.02,52.57 U7.8 47.76,52.56 C12.1 | R29.2 44.45,54.14 44.45,55.56 43.55,56.46 C11.1 43.5,58.14 43.5,59.53 43.64,59.67 J17.P$1 43.64,63.48 43.99,63.83 J73.P$1 | R29.2 41.87,53.94 40.59,52.66 C15.1 40.56,51.03 C14.1 40.56,47.26 40.49,47.18 J28.P$1 40.49,44.44 41.12,43.82 45.09,43.82 45.65,43.25 J30.P$1 43.83,39.21 40.48,39.21 40.16,38.89 40.16,33.34 | R10.2 54.33,50.68 54.13,50.48 v54.13,50.32 | v52.07,50.48 51.44,49.85 v51.44,48.26 | U6.5 52.18,32.91 v52.39,32.7 52.68,32.41 | 52.68,32.41 52.71,32.39 53.44,32.39 C18.2 | U5.5 47.63,34.77 47.31,34.45 47.31,32.39 47.78,31.91 v48.26,31.91 48.26,31.12 47.31,30.16 40.16,30.16 39.69,30.64 39.69,32.86 40.16,33.34
  Top 0.178: R9.2 40.16,33.34 | 52.68,32.41 J1.P$1 52.68,21.7 J70.P$1 52.71,16.11 J66.P$1 | J64.P$1 74.3,55.87 J60.P$1 | J62.P$1 70.57,53.18 72,53.18 D1.A 73.91,53.11 74.63,53.83 74.68,53.94 | J45.P$1 9.84,74.93 9.37,74.45 9.37,70.49 16.35,63.5 24.76,63.5 24.91,63.36 J20.P$1
  Top 0.203: J68.P$1 49.85,15.87 49.85,15.72 | 49.85,15.72 52.55,15.72 J66.P$1 | 49.85,15.72 D3.A | J20.P$1 24.91,60.47 25.26,60.47 25.94,59.79 R2.2 26.17,58.93 Q2.3 28.93,58.49 C16.1 | J76.P$1 62.56,67.45 62.71,67.31 62.87,67.31 | J7.P$1 65.46,70.01 64.77,70.01 63.34,68.58 63.34,67.79 62.87,67.31 | J64.P$1 74.3,63.34 73.98,63.66 61.91,63.66 61.59,63.98 61.59,64.61 62.6,66.72 62.6,67.04 62.87,67.31 | 69.17,67.26 69.25,67.35 70.96,69.06 70.96,69.53 72.23,70.8 72.23,73.82 74.61,76.2 74.77,76.2 76.99,78.42 76.99,88.42 | 74.68,53.94 75.17,54.43 J60.P$1
  Top 0.254: U2.5 56.09,90.49 C10.1 56.46,90.65 v57.94,90.65 | Q1.2 60.8,84.61 61.12,84.3 v62.07,84.3
  Bottom 0.178: v55.72,81.28 56.21,80.79 JP5.1 62.07,83.53 v62.07,84.3 | J73.P$1 43.99,67.32 45.56,68.9 v52.07,68.9 59.05,68.9 59.18,68.78 J76.P$1 | J52.P$1 79.46,88.02 v79.06,88.42 | v54.13,50.32 52.07,50.32 v52.07,50.48 | v51.44,48.26 40.8,48.26 40.64,48.1 40.64,47.27 J28.P$1 | v48.26,31.91 51.59,31.91 v52.39,32.7 | v84.85,78.5 84.85,75.49 83.18,73.82 83.18,70 83.23,69.96 83.18,69.88 83.35,69.71 J57.P$1
  Bottom 0.254: v62.07,84.3 57.94,88.42 v57.94,90.65
!RESET
  Top 0.178: U1.40 53.8,77.49 54.45,76.83 S1.4 S1.3 59.82,73.31 60.6,74.09 JP5.10 60.61,75.72 61.44,75.72 61.91,76.2 61.91,77.79 62.37,78.24 R1.1
A3  (via drill 0.38)
  Top 0.178: U1.9 45.56,83.01 v45.56,86.36 | v52.39,74.61 52.39,70.88 J10.P$1 56.68,63.51 56.45,63.28 J22.P$1 56.45,51.66 59.69,48.41 J35.P$1 59.69,44.61 59.21,44.13 54.77,44.13 54.13,43.5 J37.P$1 54.13,39.37 53.66,38.89 | 53.66,38.89 53.18,38.42 C17.2 | R13.1 v40.48,31.75 | U5.1 53.82,34.77 54.13,35.08 54.13,38.42 53.66,38.89
  Bottom 0.178: v45.56,86.36 43.5,86.36 41.75,84.61 41.75,75.41 42.55,74.61 v52.39,74.61 | v40.48,31.75 43.66,34.93 52.86,34.93 53.18,35.24 53.18,40.04 J37.P$1
D2  (via drill 0.38)
  Top 0.178: U1.23 38.87,76.49 38.42,76.04 v38.26,76.04 | D2.4 72.88,90.95 69.37,94.46 68.41,94.46 68.31,94.56 J53.P$1 | J14.P$1 65.94,73.34 66.2,73.34 67.47,74.61 67.47,75.88 69.04,77.45 J42.P$1
  Bottom 0.178: v38.26,76.04 38.58,76.04 41.12,73.5 62.55,73.5 62.75,73.7 62.85,73.91 62.87,73.93 62.87,73.98 63.32,74.43 J14.P$1 | J42.P$1 71.76,76.2 74.3,76.2 76.36,78.26 76.36,90.01 71.12,95.25 69.53,95.25 68.78,94.49 J53.P$1
D3
  Top 0.178: U1.14 37.6,80.99 35.56,83.03 35.01,83.03 J23.P$1
D5
  Top 0.178: U1.24 41.07,75.99 40.48,75.41 40.48,73.3 J3.P$1
D6  (via drill 0.38)
  Top 0.178: U1.29 46.08,72.75 45.4,72.07 v45.24,72.07 | J21.P$1 32.39,63.02 32.86,63.5 38.26,63.5 38.89,64.14 38.89,65.09 37.62,66.36 37.62,67.31 35.72,69.22 35.72,70.49 34.93,71.28 34.93,72.55 35.72,73.34 36.01,73.34 J18.P$1
  Top 0.203: Q2.1 27.37,57 R2.1 25.93,56.99 v24.29,56.99
  Bottom 0.178: v45.24,72.07 40.8,72.07 38.89,73.98 37.52,73.98 J18.P$1
  Bottom 0.203: J21.P$1 32.39,57.95 31.43,56.99 v24.29,56.99
D7  (via drill 0.38)
  Top 0.178: U1.30 46.58,71.85 43.47,68.74 J5.P$1 | J40.P$1 56.48,50.04 55.56,50.96 55.56,53.66 55.09,54.13 54.45,54.13 | R10.1 54.37,54.13 54.45,54.13 | U7.2 48.72,55.54 v48.9,55.72 | v54.29,55.4 54.29,54.29 54.45,54.13
  Bottom 0.178: v48.9,55.72 53.98,55.72 v54.29,55.4 | J5.P$1 37.71,67.39 37.47,67.15 37.47,66.04 40.01,63.5 60.17,63.5 60.8,62.87 63.34,58.26 64.45,56.52 67.19,51.46 67.8,50.4 69.85,47.15 71.28,44.45 70.8,43.97 56.67,43.97 56.48,44.16 J40.P$1
D8
  Top 0.178: U1.11 44.58,86.39 38.55,92.42 J8.P$1
D9
  Top 0.178: D31.4 27.31,94.13 27.78,93.66 27.78,89.38 27.89,89.27 J32.P$1 27.94,88.21 29.74,87.2 30.36,87 30.64,87 32.86,89.22 32.86,89.85 34.13,91.12 34.61,91.12 J9.P$1
  Top 0.203: U1.12 44.08,86.09 40.32,89.85 37.16,89.85 36.96,89.66 J9.P$1
  Bottom 0.178: J26.P$1 30.81,68.74 28.73,68.74 22.54,74.93 22.54,87.47 23.28,88.21 J32.P$1
DO
  Top 0.178: D33.2 20.75,70.17 17.46,70.17 16.81,69.51 J41.P$1
  Bottom 0.178: J54.P$1 17.46,83.05 17.46,70.49 16.83,69.85 16.74,69.85 J41.P$1
DOUT
  Top 0.178: D6.2 79.11,73.18 80.8,73.18 83.68,76.06 86.2,76.06 | J48.P$1 83.74,87.08 86.68,84.14 86.68,79.53 86.2,79.06 86.2,76.06 | 86.2,76.06 86.59,76.06 86.76,76.23 86.93,76.06 J50.P$1
GND  (via drill 0.38)
  Top 0.178: J65.P$1 47.36,21.75 J2.P$1 | 49.99,43.64 J31.P$1 | J29.P$1 43.67,44.89 | J11.P$1 47.15,63.66 46.83,63.34 J19.P$1 | J4.P$1 28.57,60.59 v28.57,63.34 | v23.49,58.9 22.86,58.26 22.86,56.52 22.7,56.36 v21.11,55.56 | 80.11,56.64 J59.P$1 | C23.2 24.92,66.93 24.92,64.22 25.38,63.76 25.46,63.76
  Top 0.203: J33.P$1 32.24,74.32 32.89,75.36 J6.P$1 | 87.66,71.48 J58.P$1
  other vias: 47.62,18.1 51.44,12.86 47.94,12.86 39.37,83.66 40.01,87.15 44.13,89.69 43.18,92.55 38.58,90.96 46.2,91.6 49.69,88.74 56.52,89.38 64.13,85.57 66.67,80.33 56.67,78.42 55.88,94.77 56.52,97 43.34,95.57 40.16,95.57 35.56,81.6 34.13,82.23 42.39,70.64 46.83,70.17 49.69,71.28 55.25,70.33 55.88,74.77 63.66,80.49 49.02,68.01 31.75,66.83 12.06,84.77 16.67,87.79 25.72,85.25 19.05,82.23 21.11,88.74 28.57,95.25 30.8,97.79 19.68,97.16 25.72,78.58 20.95,77.79 20.32,67.47 29.21,66.83 73.98,84.93 78.58,86.2 80.33,76.2 89.38,80.01 80.01,67.63 71.75,68.42 73.98,78.58 77.79,82.39 71.12,97.79 80.01,97 35.88,39.37 45.4,38.89 44.13,29.05 58.42,29.05 55.25,30.96 50.32,27.3 55.25,37.15 51.75,39.85 47.94,39.69 42.7,40.96 39.05,41.43 37.94,36.51 56.52,39.53 58.1,37.94 60.17,40.48 63.5,40.32 62.71,37.78 61.12,38.42 61.44,34.61 48.1,33.81 46.67,31.75 44.93,33.5 52.07,37.62 46.2,57.78 40.48,55.88 42.23,51.75 54.13,58.26 58.74,57.31 60.01,54.13 61.44,51.59 62.71,48.89 65.09,49.37 53.82,49.05 57.94,48.26 36.51,50.16 36.83,47.78 37.94,53.5 55.54,48.34 49.53,50.48 50.01,54.93 45.4,56.52 52.23,56.67 70.33,52.07 72.87,51.43 71.28,50.48 69.69,57.15 67.15,60.17 77.15,60.8 33.66,59.21 32.54,55.72 53.02,78.26 53.02,76.36 12.22,69.69 16.83,62.07 16.35,58.58 5.24,76.68 7.14,78.42 29.21,70.48 45.09,76.99 45.24,80.8 49.21,81.28 51.59,71.6 49.37,57.15 49.98,58.88 46.51,50.64
  pour Top: 13.02,104.77 86.84,104.77 99.85,82.23 50.01,0 0,82.23
  pour Bottom: 0.16,82.23 13.02,104.77 86.68,104.77 86.84,104.77 99.85,82.23 50.01,0
LEDA  (via drill 0.38)
  Top 0.178: U7.5 50.66,51.77 v50.32,51.44 | v52.86,51.12 52.85,51.13 C13.1 | R29.1 44.25,51.16 v44.29,51.12
  Bottom 0.178: v52.86,51.12 52.55,51.44 v50.32,51.44 50.01,51.12 46.94,51.12 46.78,51.28 46.25,51.28 46.09,51.12 v44.29,51.12
N$2
  Top 0.178: U1.1 49.58,84.19 49.96,84.57 Y1.P$2 51.48,84.77 52.72,84.77 C5.2
N$3
  Top 0.178: U6.1 48.77,33.53 49.21,33.97 55.09,33.97 56.36,35.24 58.9,35.24 59.53,34.61 59.53,30.8 59.21,30.48 58.74,30.48 58.26,30.96 C19.1
N$4
  Top 0.178: U1.2 49.08,84.48 49.21,84.61 49.21,85.35 C6.1 | C6.1 | Y1.P$1 50.24,87.07 50.01,86.84 50.01,86.2 C6.1
N$5
  Top 0.178: U7.3 U7.4
N$6  (via drill 0.38)
  Top 0.178: U5.4 47.78,36.67 | 47.78,36.67 47.46,36.67 45.88,35.08 45.88,32.39 45.24,31.75 v45.09,31.75 R13.2 | C17.1 48.1,38.42 47.78,38.1 47.78,36.67 | R12.1 56.67,30.16 55.56,29.05 v55.56,28.58
  Bottom 0.178: v45.09,31.75 48.26,28.58
  Bottom 0.203: 48.26,28.58 50.96,28.58 51.12,28.73 55.4,28.73 v55.56,28.58
N$7
  Top 0.203: Q2.2 29.44,56.12 30.31,55.26 D4.C 30.31,52.85 JP2.1
N$10
  Top 0.178: R12.2 C19.2
N$11  (via drill 0.38)
  Top 0.178: R9.1 R11.2 C20.1 v44.77,36.51 | U5.3 50.64,36.67 49.69,35.72 v47.94,35.72
  Bottom 0.178: v47.94,35.72 47.15,36.51 v44.77,36.51
N$12
  Top 0.178: D1.C 72.07,57.15 71.44,57.79 71.44,58.38 R15.2
N$14
  Top 0.178: D31.2 19.97,90.93 19.68,90.65 19.68,85.41 20.42,84.67 D32.4
N$15
  Top 0.203: R17.2 49.04,18.18 D3.C
N$16  (via drill 0.38)
  Top 0.178: D32.2 15.19,80.49 v13.18,80.49 | v16.19,74.77 19.37,71.6 v19.84,71.6 | v24.13,71.91 24.13,72.55 24.78,73.2 D33.4
  Bottom 0.178: v13.18,80.49 13.18,78.11 16.19,75.09 v16.19,74.77 | v19.84,71.6 23.81,71.6 v24.13,71.91
N$21
  Top 0.178: J71.P$1 62.32,87.22 60.64,88.9 60.64,89.22 61.14,89.71 S2.3
N$22
  Top 0.178: D2.2 80.95,94.15 81.6,93.5 81.6,81.44 80.78,80.62 D5.4
N$23
  Top 0.178: D6.4 75.23,70 77.63,72.39 77.63,77.31 79.85,79.53 81.28,79.53 83.03,81.28 83.03,83.34 83.5,83.82 D5.2
SCL
  Top 0.178: U1.32 47.58,72.28 53.28,66.57 J38.P$1 | U7.7 48.74,52.56 48.74,50.17 49.69,49.21 | 49.69,49.21 50.08,48.82 J13.P$1 | 49.69,49.21 49.69,49.37 51.75,51.44 51.75,54.77 50.48,56.04 50.48,57.84 J15.P$1 53.18,63.66 53.54,64.01 J38.P$1 | J38.P$1 53.5,66.54
SDA  (via drill 0.38)
  Top 0.178: U1.31 47.08,71.82 50.34,68.57 J12.P$1 50.34,63.67 50.01,63.35 J16.P$1 49.05,59.58 49.05,59.21 47.75,57.91 v47.75,56.99 U7.1
  Top 0.203: v43.66,49.21 44.45,49.21 46.48,47.19 46.51,47.19 46.58,47.12 J39.P$1
  Bottom 0.178: 46.51,55.72 47.78,56.99 v47.75,56.99
  Bottom 0.203: 46.51,55.72 46.2,55.4 43.82,55.4 43.02,54.61 43.02,49.85 v43.66,49.21
SWCLK
  Top 0.178: U1.45 53.48,79.99 56.99,83.5 61.75,83.5 62.39,82.87 62.39,81.31 JP5.4
SWDIO  (via drill 0.38)
  Top 0.178: U1.46 53.19,80.49 53.98,81.28 v53.98,81.76
  Bottom 0.178: v53.98,81.76 53.98,78.58 57.79,74.77 61.59,74.77 62.39,75.57 62.39,80.33 61.93,80.79 JP5.2
USB_D+  (via drill 0.38)
  Top 0.178: JP3.D+1 50.15,92.85 47.78,90.49 47.78,88.74 48.1,88.42 48.1,84.93 48.26,84.77 v48.26,84.46 | U1.34 48.58,77.63 v48.1,78.11
  Bottom 0.178: v48.26,84.46 48.26,78.26 v48.1,78.11
USB_D-  (via drill 0.38)
  Top 0.178: JP3.D-1 50.8,92.71 48.26,90.17 48.26,89.54 v48.42,89.54 | U1.33 48.08,76.06 v47.47,76.68
  Bottom 0.178: v48.42,89.54 47.47,88.58 v47.47,76.68
VBUS
  Top 0.178: 51.45,92.49 C7.1 50.96,92.08 50.64,91.76 50.64,90.49 | Q1.1 58.9,84.3 58.58,83.98 55.72,83.98 55.4,84.3 R4.2 54.67,85.51 54.13,86.04 54.13,87.47 53.02,88.59 U2.3 50.96,88.59 50.96,88.58 50.64,88.9 50.64,90.49 | U2.1 50.64,90.49
  Top 0.406: JP3.VBUS1 51.45,92.49
VDDANA
  Top 0.178: U1.6 47.08,84.21 46.99,84.3 C3.1
VDDCORE
  Top 0.178: U1.43 54.54,78.99 58.26,82.71 C2.1
VIN
  Top 0.178: C9.1 57.18,87.3 Q1.3 59.64,87.52 S2.2